# Altium PCB 3 wave VCO.PcbDoc
Units mm, origin at the board's own origin, x right, y up, seen from the top; angles counter-clockwise.
Board outline 39.3 x 106.5 mm, 2 copper layers (Top Layer, Bottom Layer); 67 components, 44 nets, 202 pads, 148 vias.
Unrouted connection lines stored in the file: 40.
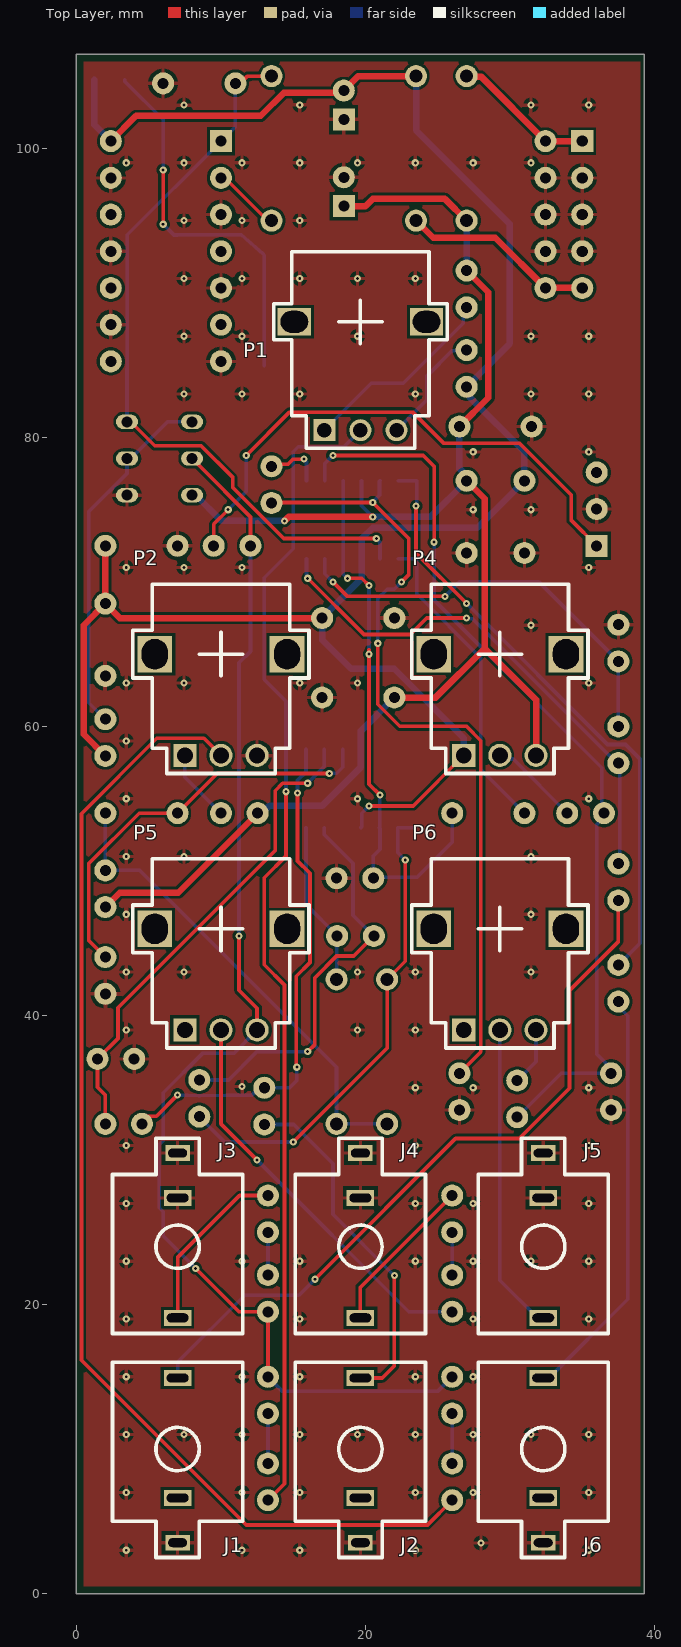
[diagram p0: Top Layer view]
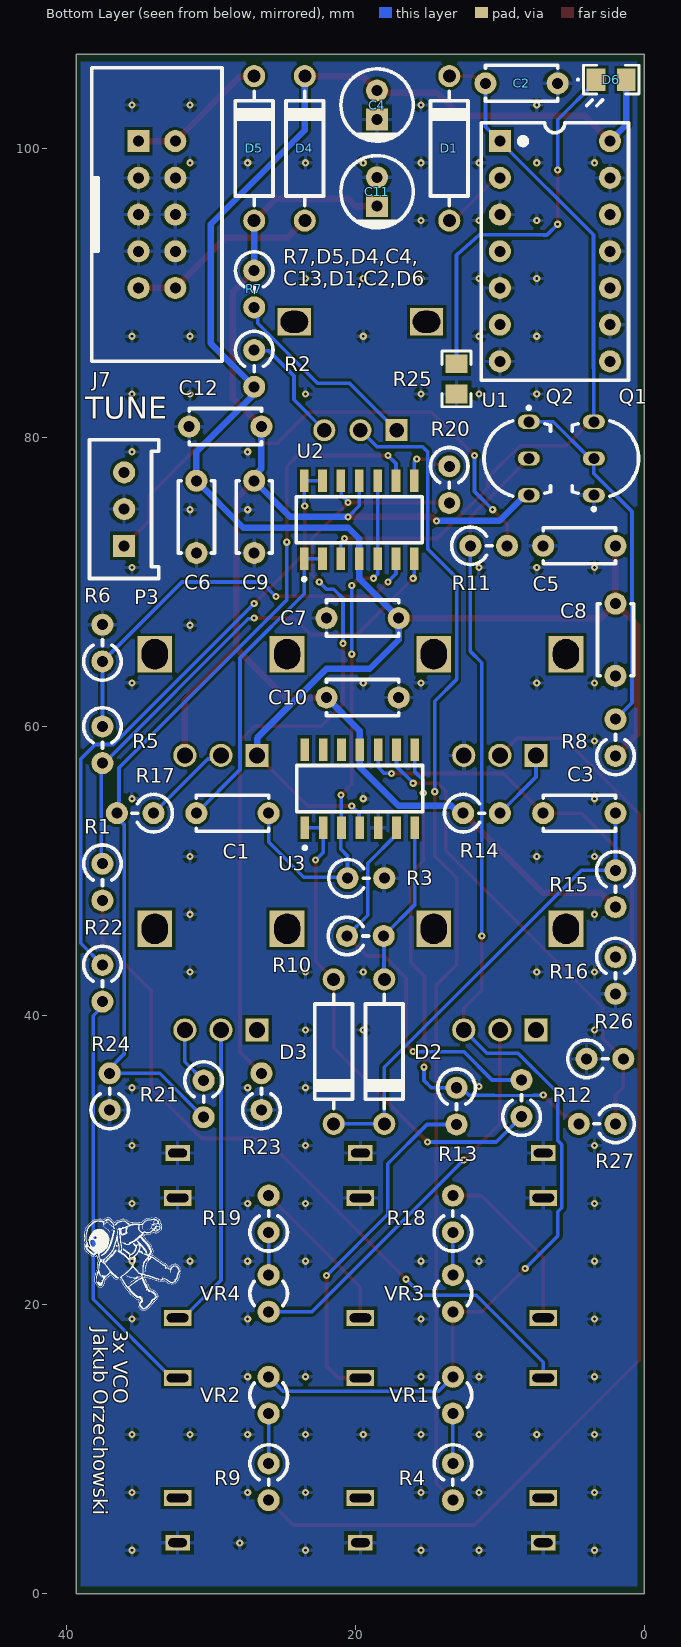
[diagram p1: Bottom Layer view, seen from below]
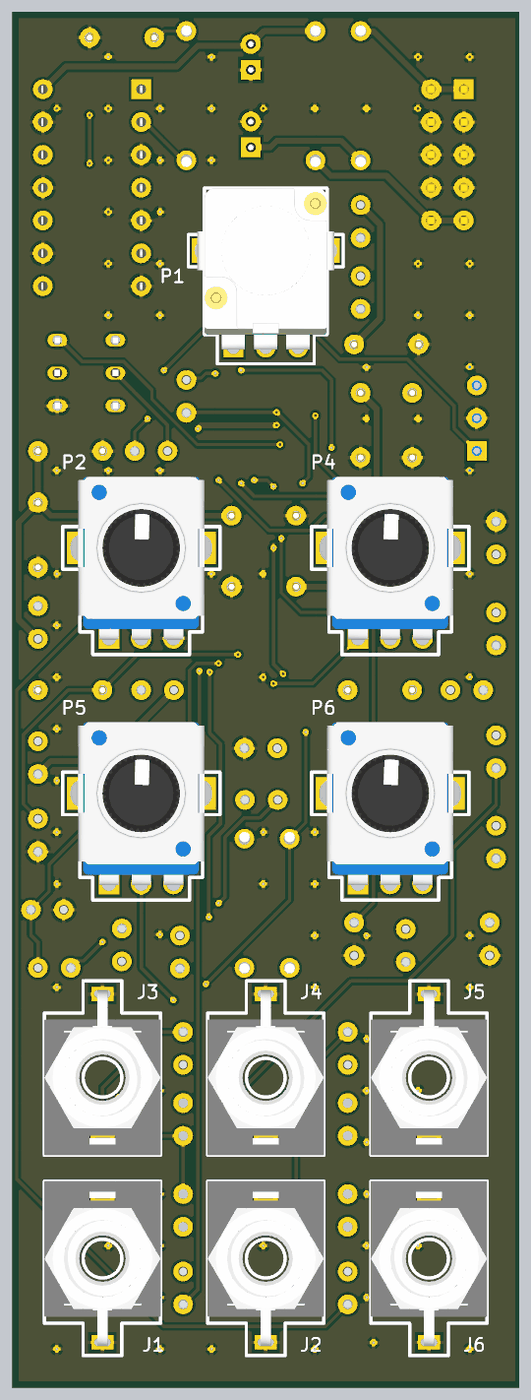
[diagram p2: 3D render of the assembled board from above, using the file's embedded part models]
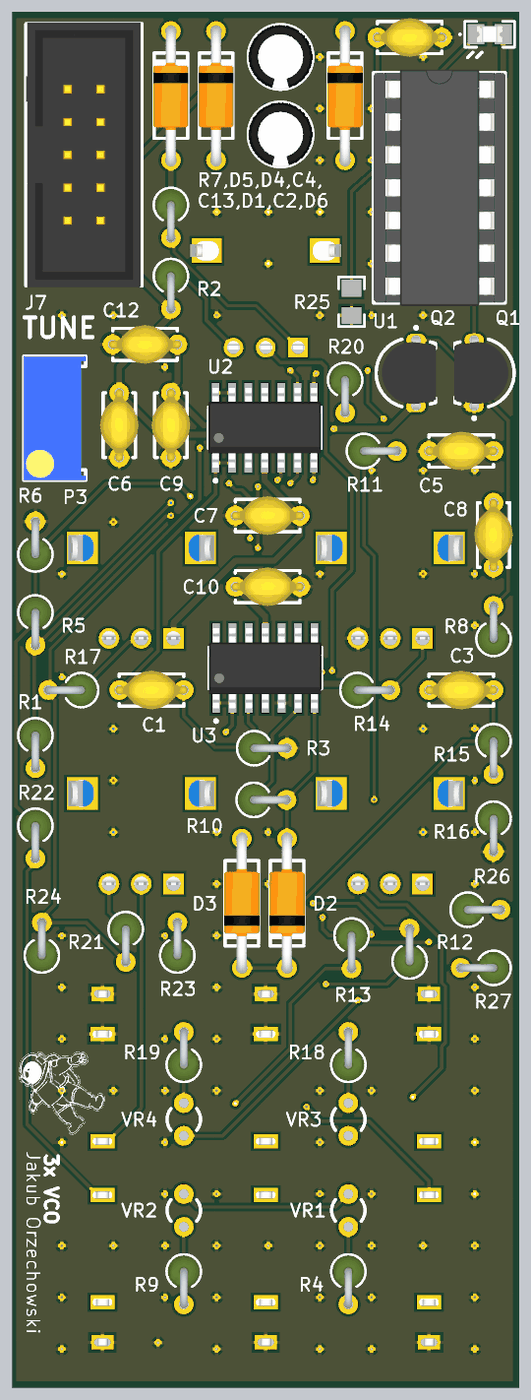
[diagram p3: 3D render of the assembled board from below, using the file's embedded part models]

## Layer stack, top to bottom
Top Solder: solder mask 0.0102, Solder Resist, Dk 3.5
Top Layer: signal copper 0.0356
Dielectric 1: dielectric 0.32, FR-4, Dk 4.8
Bottom Layer: signal copper 0.0356
Bottom Solder: solder mask 0.0102, Solder Resist, Dk 3.5

## Board outline
0,0 0,106.5 39.3,106.5 39.3,0

## Design rules (kind name [scope] priority, off if disabled: settings)
Clearance [All] p1: gap=0.2 ignorepadtopadclearanceinfootprint=FALSE except(0.25: Arc-Hole Track-Hole SMDPad-Hole THPad-Hole Via-Hole Fill-Hole Poly-Hole Region-Hole Text-Hole)
HoleSize [All] p1: absolutevalues=TRUE maxlimit=6.2 minlimit=0 maxpercent=80.000 minpercent=20.000
HoleToHoleClearance [All] p1: gap=0.3 allowstackedmicrovias=TRUE
MinimumSolderMaskSliver [All] p1: minsoldermaskwidth=0.2
PolygonConnect [All] p1: connectstyle=Relief reliefconductorwidth=0.254 reliefentries=4 polygonreliefangle="90 Angle" airgapwidth=0.254
RoutingVias [All] p1: holewidth=0.2 width=0.5 viastyle="Through Hole" minholewidth=0.15 minwidth=0.3 maxholewidth=0.711 maxwidth=1.27
SilkToSilkClearance [All] p1: silktosilkclearance=0.15
SilkToSolderMaskClearance [IsPad] p1: minsilkscreentomaskgap=0.1 clearancetoexposedcopper=TRUE
SolderMaskExpansion [All] p1: expansion=0.05 istentingtop=FALSE
SupplyNets "Schematic Supply Nets_2" [InNet('-12 V')] p1: voltage=0.000
SupplyNets "Schematic Supply Nets_1" [InNet('GND')] p2: voltage=0.000
SupplyNets "Schematic Supply Nets" [InNet('+12 V')] p3: voltage=0.000
Width [All] p1: maxlimit=0.5 minlimit=0.2 preferedwidth=0.254
25 further rules are at their usual default settings.

## Components (designator, comment, footprint, x,y, rotation, side; value= is the part's Value field where it differs from the comment)
C1 "CAP" "Cap THT 5mm" 26,54 r0 bottom value=1uF
C2 "CAP" "Cap THT 5mm" 6,104.5 r0 bottom value=2,2nF
C3 "CAP" "Cap THT 5mm" 7,54 r180 bottom value=1uF
C4 "CAP" "Cap electrolytic THT 5mm" 18.5,102 r90 bottom value=47uF
C5 "CAP" "Cap THT 5mm" 7,72.5 r180 bottom value=100nF
C6 "CAP" "Cap THT 5mm" 31,72 r90 bottom value=100nF
C7 "CAP" "Cap THT 5mm" 22,67.5 r180 bottom value=100nF
C8 "CAP" "Cap THT 5mm" 2,63.5 r90 bottom value=100nF
C9 "CAP" "Cap THT 5mm" 27,77 r270 bottom value=100nF
C10 "CAP" "Cap THT 5mm" 22,62 r180 bottom value=100nF
C11 "CAP" "Cap electrolytic THT 5mm" 18.5,96 r90 bottom value=47uF
C12 "CAP" "Cap THT 5mm" 26.5,80.75 r0 bottom value=100nF
D1 "DIODE" "Diode THT 10 mm" 13.5,95 r90 bottom
D2 "DIODE" "Diode THT 10 mm" 18,42.5 r270 bottom
D3 "DIODE" "Diode THT 10 mm" 21.5,42.5 r270 bottom
D4 "SCHOTTKY" "Diode THT 10 mm" 23.5,95 r90 bottom
D5 "SCHOTTKY" "Diode THT 10 mm" 27,95 r90 bottom
D6 "LED" "LED SMD 0805" 1.25,104.75 r0 bottom
J1 "JACK Mono" PJ301M 7,10 r0 top
J2 "JACK Mono" PJ301M 19.65,10 r0 top
J3 "JACK Mono" PJ301M 7,24 r180 top
J4 "JACK Mono" PJ301M 19.65,24 r180 top
J5 "JACK Mono" PJ301M 32.3,24 r180 top
J6 "JACK Mono" PJ301M 32.3,10 r0 top
J7 "IDC 10" "IDC 10 PIN" 35,100.5 r0 bottom
P1 "Mono Pot" "Alpha 9mm mono" 19.65,88 r0 top value=B100k
P2 "Mono Pot" "9 mm PCB Potentiometer" 10,65 r0 top value=B100k
P3 "VR" "Multiturn Potentiometer inline" 36,72.5 r90 bottom value=1k
P4 "Mono Pot" "9 mm PCB Potentiometer" 29.3,65 r0 top value=B100k
P5 "VR" "9 mm PCB Potentiometer" 10,46 r0 top value=B1Meg
P6 "VR" "9 mm PCB Potentiometer" 29.3,46 r0 top value=B250k
Q1 "BC548" "TO-92 wide" 3.5,81.08 r270 bottom
Q2 "BC558" "TO-92 wide" 8,76 r90 bottom
R1 "RES" "Resistor THT vertical" 37.5,50.5 r270 bottom value=1k
R2 "RES" "Resistor THT vertical" 27,86.04 r270 bottom value=100k
R3 "RES" "Resistor THT vertical" 20.54,49.5 r180 bottom value=100k
R4 "RES" "Resistor THT vertical" 13.25,9 r270 bottom value=100k
R5 "RES" "Resistor THT vertical" 37.5,60 r270 bottom value=100k
R6 "RES" "Resistor THT vertical" 37.5,64.5 r90 bottom value=47k
R7 "RES" "Resistor THT vertical" 27,91.54 r270 bottom value=33k
R8 "RES" "Resistor THT vertical" 2,57.96 r90 bottom value=1Meg
R9 "RES" "Resistor THT vertical" 26,9 r270 bottom value=1Meg
R10 "RES" "Resistor THT vertical" 20.58,45.5 r180 bottom value=10k
R11 "RES" "Resistor THT vertical" 12.04,72.5 r180 bottom value=1k5
R12 "RES" "Resistor THT vertical" 8.5,33 r90 bottom value=10k
R13 "RES" "Resistor THT vertical" 13,35 r270 bottom value=1k
R14 "RES" "Resistor THT vertical" 12.54,54 r180 bottom value=100k
R15 "RES" "Resistor THT vertical" 2,50.04 r270 bottom value=10k
R16 "RES" "Resistor THT vertical" 2,44.04 r270 bottom value=100k
R17 "RES" "Resistor THT vertical" 33.96,54 r0 bottom value=100k
R18 "RES" "Resistor THT vertical" 13.25,25 r90 bottom value=100k
R19 "RES" "Resistor THT vertical" 26,25 r90 bottom value=100k
R20 "RES" "Resistor THT vertical" 13.5,78 r270 bottom value=100k
R21 "RES" "Resistor THT vertical" 30.5,35.5 r270 bottom value=68k
R22 "RES" "Resistor THT vertical" 37.5,43.5 r270 bottom value=1k
R23 "RES" "Resistor THT vertical" 26.5,33.46 r90 bottom value=68k
R24 "RES" "Resistor THT vertical" 37,33.46 r90 bottom value=14k
R25 "RES" "Resistor SMD 0805" 13,85.1 r270 bottom value=10k
R26 "RES" "Resistor THT vertical" 4,37 r180 bottom value=47k
R27 "RES" "Resistor THT vertical" 2,32.5 r0 bottom value=100k
U1 "CD40106" "DIP-14 socket" 10,100.5 r180 bottom
U2 "TL074CDR" SOIC14 23.54,71.6 r90 bottom
U3 "TL074CDR" SOIC14 23.5,53 r90 bottom
VR1 "NTC" "THERMISTOR THT 2,54 MM" 13.25,12.46 r90 bottom value=10k
VR2 "NTC" "THERMISTOR THT 2,54 MM" 26,12.46 r90 bottom value=10k
VR3 "NTC" "THERMISTOR THT 2,54 MM" 13.25,22.04 r270 bottom value=10k
VR4 "NTC" "THERMISTOR THT 2,54 MM" 26,22.04 r270 bottom value=10k

## Footprints (in the part's own frame and the unit in brackets; to place one, negate y for a bottom-side part, rotate by r counter-clockwise, add the part's x,y. Pads: shape width x height; smd on the part's side, far side on the other; paste and mask are expansions set on the pad)
"9 mm PCB Potentiometer" [mm] "Generic 9 mm shaft potentiometer PCB mount"
  rect 1.6x1.6 hole 1.1: 1(-2.5,-7)
  round 1.6 hole 1.1: 2(0,-7) 3(2.5,-7)
  rect 2.4x2.5 hole 1.8 slot 2.1 at 90 deg: 11(-4.575,0) 11(4.575,0)
  silkscreen extent -6.1,-8.25 6.1,4.85, body extent -5.66,-7.1 5.66,5.5, height 25
"Alpha 9mm mono" [mm] "Alpha 9 mm mono potentiometer"
  rect 1.524x1.524 hole 1: 1(-2.5,-7.5)
  round 1.524 hole 1: 2(0,-7.5) 3(2.5,-7.5)
  rect 2.3x1.9 hole 1.5 slot 1.9 at 0 deg: 11(-4.575,0) 11(4.575,0)
  silkscreen extent -6,-8.75 6,4.85, body extent -5.85,-7.65 5.85,4.85, height 25.1
"Cap electrolytic THT 5mm" [mil] "THT electrolytic capacitor 5 mm diameter"
  rect 60x60 hole 30: 1(0,0)
  round 60 hole 30: 2(78.74,0)
  silkscreen extent -59,-98 138,98, body extent -59,-98 137,98, height 354
"Cap THT 5mm" [mil] "THT ceramic capacitor 5 mm pitch"
  round 60 hole 30: 1(0,0) 2(196.85,0)
  silkscreen extent 0,-49 197,49, body extent -11,-59 208,59, height 197
"Diode THT 10 mm" [mil] "THT axial diode 10 mm pitch"
  round 60 hole 35.43: 1(0,0) 2(393.7,0)
  silkscreen extent 41,-51 352,51, body extent -21,-53 411,53, height 107
"DIP-14 socket" [mil] "Socket for DIP-14 ICs"
  rect 60x60 hole 30: 1(0,0)
  round 60 hole 30: 2(0,-100) 3(0,-200) 4(0,-300) 5(0,-400) 6(0,-500) 7(0,-600) 8(300,-600) 9(300,-500) 10(300,-400) 11(300,-300) 12(300,-200) 13(300,-100) 14(300,0)
  silkscreen extent -51,-651 350,50, body extent -50,-660 352,60, height 310
"IDC 10 PIN" [mil] "10 PIN IDC Connector"
  rect 60x60 hole 30: 1(0,0)
  round 60 hole 30: 2(-100,0) 3(0,100) 4(-100,100) 5(0,200) 6(-100,200) 7(0,300) 8(-100,300) 9(0,400) 10(-100,400)
  silkscreen extent -227,-200 127,600, body extent -223,-204 127,604, height 354
"LED SMD 0805" [mm] "SMD LED diode 0805 package"
  rect 1.3x1.55 smd: 1(0,0) 2(2.1,0)
  silkscreen extent -0.87,-1 3.36,1.8, body extent 0.05,-0.63 2.05,0.63, height 0.8
"Multiturn Potentiometer inline" [mil] "PCB mount inline multiturn trimmer pot with parameter label"
  rect 60x60 hole 30: 1(0,0)
  round 60 hole 30: 2(100,0) 3(200,0)
  silkscreen extent -89,-94 289,94, body extent -89,-95 289,95, height 454
PJ301M [mm] "3,5 mm Jack mono PCB Mount"
  rect 1.7x1.1 hole 0.6 slot 1.3 at 0 deg: 1(0,-6.48)
  rect 1.9x1.1 hole 0.6 slot 1.5 at 0 deg: 2(0,-3.38) 3(0,4.92)
  silkscreen extent -4.5,-7.5 4.5,6, body extent -4.5,-6.73 4.5,6, height 14
"Resistor SMD 0805" [mm] "SMD resistor 0805 package"
  rect 1.3x1.55 smd: 1(0,0) 2(2.1,0)
  silkscreen extent -0.87,-1 2.98,1, body extent -0.1,-0.72 2.2,0.72, height 0.7
"Resistor THT vertical" [mil] "THT axial resistor 10 mm pitch"
  round 60 hole 30: 1(0,0) 2(100,0)
  silkscreen extent -51,-51 59,51, body extent -49,-49 112,49, height 406
SOIC14 [mm] "SOIC14 SMD package"
  rect 1.55x0.6 smd: 1(0,0) 2(0,-1.27) 3(0,-2.54) 4(0,-3.81) 5(0,-5.08) 6(0,-6.35) 7(0,-7.62) 8(5.4,-7.62) 9(5.4,-6.35) 10(5.4,-5.08) 11(5.4,-3.81) 12(5.4,-2.54) 13(5.4,-1.27) 14(5.4,0)
  silkscreen extent -1.5,-8.17 4.3,0.55, body extent -0.4,-8.19 5.8,0.57, height 1.75
"THERMISTOR THT 2,54 MM" [mil]
  round 60 hole 30: 1(0,0) 2(100,0)
  silkscreen extent 17,-51 83,51
"TO-92 wide" [mil] "TO-92 THT package wide legs"
  oval 39.37x60 hole 30: 1(0,0) 2(100,0) 3(200,0)
  silkscreen extent -3,-59 242,122, body extent -9,-61 209,104, height 323

## Part data
C1 C2 C3 C5 C6 C7 C8 C9 C10 C12: library part "Capacitor THT 5mm", "THT Capacitor Non-Polarised 5 mm Pitch", Package Type=THT
C4 C11: library part "Capacitor Electr THT 5mm", "THT Electrolytic Capacitor 5 mm Diameter", Package Type=THT
D1 D2 D3: library part "Diode THT", "Generic THT Axial Diode 10 mm Pitch", Package Type=THT, Model=1N4148, Type=Diode
D4 D5: library part "Schottky Diode THT", "Generic THT Axial Schottky Diode 10 mm Pitch", Package Type=THT, Model=1N5819, Type=Schottky
D6: library part "LED SMD", "SMD LED Diode 0805 Package", Color=GREEN, Package Type=SMD, Type=LED
J1 J2 J3 J4 J5 J6: library part PJ301M, "PJ301M Eurorack 3,5 mm Patch Socket PCB Mount", Package Type=THT
  J1: Label="SAW OUT"
  J2: Label="TRIANGLE OUT"
  J3: Label="CV 1V/OCT"
  J4: Label="FM CV"
  J5: Label="PWM CV"
  J6: Label="PULSE OUT"
J7: library part "IDC 10 pin", "10 Pin IDC Connector"
P1: library part "Potentiometer Alpha 9mm mono", "PCB Mount Alpha 9mm Mono Potentiometer THT", Package Type=THT, Parameter="F COARSE", Type=Potentiometer
P2 P4: library part "Potentiometer 9 mm", "PCB Mount 9mm Mono Potentiometer THT", Package Type=THT, Type=Potentiometer
  P2: Parameter="F FINE"
  P4: Parameter="PWM WIDTH"
P3: library part "VR A Multiturn THT", "PCB Mount Multiturn Trimmer Potentiometer Top Adjustable as Variable Resistor Clockwise Increase", Package Type=THT, Parameter=TUNE, Type=Potentiometer
P5 P6: library part "VR B 9 mm", "PCB Mount 9mm Mono Potentiometer THT as Variable Resistor Clockwise Decrease", Package Type=THT, Type=Potentiometer
  P5: Parameter="FM CV LVL"
  P6: Parameter="PWM CV LVL"
Q1: "BC548 NPN Transistor THT TO-92 Package", Package=TO-92, Package Type=THT, Type="NPN Transistor"
Q2: "BC558 PNP Transistor THT TO-92 Package", Package=TO-92, Package Type=THT, Type="PNP Transistor"
R1 R2 R3 R4 R5 R6 R7 R8 R9 R10 R11 R12 R13 R14 R15 R16 R17 R18 R19 R20 R21 R22 R23 R24 R26 R27: library part "Resistor THT", "THT Axial Resistor 10mm Pitch", Package Type=THT
R25: library part "Resistor SMD 0805", "SMD Resistor 0805 package", Package Type=SMD
U1: library part "CD40106 DIP-14", "CD40106 Hex Schmitt Trigger Inverter DIP-14 Package", Package=DIP-14, Package Type=THT, Type="Schmitt Trigger"
U2 U3: library part "TL074CDR SOIC14", "TL074CDR Quad Op-Amp SOIC14 Package", Package=SOIC14, Package Type=SMD, Type="Op Amp"
VR1 VR2 VR3 VR4: library part "Thermistor NTC THT", "THT NTC Thermistor 2,54 mm Pitch", Package Type=THT

## Via types
v1: diameter 0.5, hole 0.2, Top Layer to Bottom Layer, 148 vias

## Nets (pads, with @x,y where several pads share a name; then routed paths per layer and width w, separated by ;. In a path a pad name is that pad's centre, name@x,y a point inside that pad or via, vN(x,y) a via of type N, cw(c..) or ccw(c..) an arc to the next point about the centre after c; other vN are vias at no path point)
1V/OCT: J3.3 R18.2 | length 12.2
  Top Layer w0.254: J3.3 7,23.25 11.29,27.54 R18.2
"+12 V": C4.2 C5.2 C6.2 C7.2 C8.2 D4.2 D6.1 P4.1 R2.2 R8.1 U1.14 U2.4 U3.4 | length 137.1
  Top Layer w0.254: v1(20.25,54.5) 23.3,54.5 P4.1
  Top Layer w0.45: R8.1 0.5,59.46 0.5,67 C8.2 ; C5.2 C8.2 ; U1.14 4.13,102.25 12.75,102.25 14.357,103.857 18.357,103.857 C4.2 19.5,105 D4.2 ; C7.2 3,67.5 C8.2
  Bottom Layer w0.254: U3.4 19.75,53.06 19.75,54 v1(20.25,54.5)
  Bottom Layer w0.45: D6.1 1.25,101.63 U1.14 ; D4.2 23.5,101.25 30,94.75 30,86.5 R2.2 27.205,83.295 27.205,82.795 31,79 C6.2 27.75,73.75 20.5,73.75 19.73,72.98 U2.4 19.73,70.23 C7.2 17,66 19,64 22,64 26.8,59.2 P4.1
"-12 V": C9.1 C10.1 C11.1 C12.1 D5.1 P4.3 Q2.1 R7.1 R14.1 R15.2 U2.11 U3.11 | length 108.8
  Top Layer w0.45: R15.2 3,48.5 7.04,48.5 R14.1 ; v1(14.394,74.219) 14.675,74.5 v1(20.5,74.5) ; C11.1 20,96 20.5,96.5 25.5,96.5 D5.1 ; C10.1 24.852,62 28.25,65.398 ; C12.1 28.5,82.75 28.5,83 28.5,90.04 R7.1 ; C9.1 28.25,75.75 28.25,65.398 ; P4.3 31.8,61.848 28.25,65.398
  Bottom Layer w0.254: U2.11 19.73,75.27 v1(20.5,74.5)
  Bottom Layer w0.45: Q2.1 8.262,76 10.043,74.219 v1(14.394,74.219) ; R14.1 12.831,54 13.331,54.5 17,54.5 19.69,57.19 U3.11 19.69,59.69 C10.1 ; v1(20.5,74.5) 24.5,74.5 C9.1 27,77.344 26.5,77.844 C12.1 ; R7.1 D5.1
"FM CV": J4.3 R19.2 | length 11.1
  Top Layer w0.254: J4.3 19.65,21.19 R19.2
GND: C2.1 C4.1 C5.1 C6.1 C7.1 C8.1 C9.2 C10.2 C11.2 C12.2 J1.1 J2.1 J3.1 J3.2 J4.1 J4.2 J5.1 J5.2 J6.1 J7.3 J7.4 J7.5 J7.6 J7.7 J7.8 P2.3 P3.2 Q1.3 R3.2 R6.2 R16.2 R23.1 R24.1 R25.2 R26.1 U1.3 U1.5 U1.7 U1.9 U1.11 U1.13 U3.5
  other v1: 3.45,3 11.45,3 15.45,3 23.45,3 35.45,3 28,3.5 3.45,7 11.45,7 15.45,7 23.45,7 27.45,7 35.45,7 3.45,11 7.45,11 11.45,11 15.45,11 19.45,11 23.45,11 27.45,11 31.45,11 35.45,11 3.45,15 11.45,15 15.45,15 23.45,15 27.45,15 3.45,19 15.45,19 27.45,19 35.45,19 3.45,23 11.45,23 15.45,23 23.45,23 27.45,23 31.45,23 35.45,23 3.45,27 23.45,27 27.45,27 35.45,27 3.45,31 23.45,31 35.45,31 23.45,35 27.45,35 35.45,35 11.45,35.077 3.45,39 19.45,39 23.45,39 3.45,43 7.45,43 19.45,43 23.45,43 31.45,43 3.45,47 31.45,47 3.45,51 7.45,51 31.45,51 3.45,55 19.45,55 35.45,55 3.45,59 3.45,63 7.45,63 15.45,63 19.45,63 35.45,63 31.45,67 3.45,71 7.45,71 11.45,71 35.45,71 27.45,75 31.45,75 27.45,79 35.45,79 7.45,83 11.45,83 15.45,83 23.45,83 31.45,83 35.45,83 7.45,87 11.45,87 19.45,87 31.45,87 35.45,87 7.45,91 11.45,91 15.45,91 19.45,91 23.45,91 7.45,95 11.45,95 15.45,95 3.45,99 7.45,99 11.45,99 15.45,99 19.45,99 23.45,99 27.45,99 31.45,99 7.45,103 15.45,103 31.45,103 35.45,103
NetC1_1: C1.1 R3.1 U2.5 U2.10 U3.3 | length 37.9
  Top Layer w0.254: v1(18.75,70.25) 19.75,70.25 v1(20.25,69.75) ; 20.25,65.3 20.25,56 v1(21,55.25)
  Bottom Layer w0.254: U2.10 U2.5 18.46,70.54 v1(18.75,70.25) ; 20.25,65.3 v1(20.25,69.75) ; v1(21,55.25) 20.982,55.232 20.982,53.022 U3.3 21,52.96 21,51.5 20.54,51.04 R3.1 20.609,49.569 23.569,49.569 26,52 C1.1
  other v1: 20.25,65
NetC1_2: C1.2 U2.1 U2.2 | length 22
  Bottom Layer w0.254: U2.2 U2.1 23.54,69.174 27.981,64.733 27.981,57.019 C1.2
NetC2_2: C2.2 D1.2 Q1.1 U1.1 U2.3 | length 51.7
  Top Layer w0.254: Q1.1 3.762,81.08 5.421,79.421 8.627,79.421 10.827,77.221 10.827,76.517 14.344,73 v1(20.75,73) ; C2.2 11.344,104.5 11.844,105 D1.2
  Bottom Layer w0.254: Q1.1 3.5,84.764 3.523,84.787 3.523,94.023 U1.1 11,101.5 C2.2 ; v1(20.75,73) 21,72.75 U2.3
NetC3_1: C3.1 R16.1 U3.10 | length 28.5
  Top Layer w0.254: R16.1 0.857,45.183 0.857,50.513 4.344,54 C3.1 9.75,56.75 v1(17.5,56.75)
  Bottom Layer w0.254: v1(17.5,56.75) 17.518,56.768 18.018,56.768 18.42,57.17 U3.10
NetC3_2: C3.2 D2.2 D3.2 R15.1 | length 33
  Bottom Layer w0.254: C3.2 R15.1 4.374,50.04 18,36.414 D2.2 D3.2
NetD1_1: D1.1 U1.2 | length 4.7
  Top Layer w0.254: U1.2 10.27,97.96 13.23,95 D1.1
NetD2_1: D2.1 R10.2 U3.7 | length 11.4
  Bottom Layer w0.254: U3.7 15.88,47.684 18.04,45.524 R10.2 18.02,45.48 18.02,42.52 D2.1
NetD3_1: D3.1 R12.1 U3.1 U3.2 | length 33.7
  Top Layer w0.254: v1(15,31.25) 21.5,37.75 D3.1 22.75,43.75 v1(22.75,50.75)
  Bottom Layer w0.254: R12.1 10.25,31.25 v1(15,31.25) ; v1(22.75,50.75) 22.23,51.27 U3.2 U3.1
NetD4_1: D4.1 J7.9 J7.10 | length 13.4
  Top Layer w0.45: D4.1 24.687,93.813 28.987,93.813 J7.10 J7.9
NetD5_2: D5.2 J7.1 J7.2 | length 9.9
  Top Layer w0.45: D5.2 27.034,104.966 27.994,104.966 J7.2 J7.1
NetD6_2: D6.2 R25.1 | length 26.6
  Top Layer w0.254: v1(6,94.75) v1(6,98.5)
  Bottom Layer w0.254: D6.2 3.35,104.625 6,101.975 v1(6,98.5) ; v1(6,94.75) 6.676,94.074 6.75,94 6.96,94 10.896,94.03 cw(c10.898,93.776) 10.901,94.03 11.314,94.022 11.407,94.02 12.914,92.698 12.92,92.693 12.926,92.687 ; 12.926,92.687 13,92.613 R25.1@13,84.971
NetP1_1: P1.1 R7.2 | length 13.9
  Bottom Layer w0.254: P1.1 20.4,83.75 22.614,83.75 26.757,87.893 26.757,88.757 R7.2
NetP1_2: P1.2 R4.2 | length 80.9
  Top Layer w0.254: R4.2 14.393,7.603 14.393,42.107 12.994,43.506 12.994,49.528 14.5,51.034 14.5,55.484 v1(14.503,55.487)
  Bottom Layer w0.254: v1(14.503,55.487) 14.5,55.49 14.5,61.75 12.994,63.256 12.994,70.288 15,72.294 15,79 15.357,79.357 18.507,79.357 P1.2
NetP1_3: P1.3 R2.1 | length 8.1
  Bottom Layer w0.254: P1.3 24.25,82.6 24.25,84.25 26.006,86.006 26.966,86.006 R2.1
NetP2_1: P2.1 R14.2 | length 5
  Bottom Layer w0.254: P2.1 7.5,56.5 R14.2
NetP2_2: P2.2 R9.2 | length 81.2
  Top Layer w0.254: P2.2 8.819,59.181 5.565,59.181 0.349,53.965 0.349,16.151 11.75,4.75 24.29,4.75 R9.2
NetP3_1: P3.1 R11.2 | length 37.5
  Top Layer w0.254: R11.2 9.5,74 v1(10.5,75) ; v1(11.75,78.75) 14.75,81.75 23.25,81.75 25.393,79.607 30.643,79.607 34.25,76 34.25,74.25 P3.1
  Bottom Layer w0.254: v1(10.5,75) 11.75,76.25 v1(11.75,78.75)
NetP4_2: P4.2 R17.1 | length 6.3
  Bottom Layer w0.254: P4.2 29.558,57.742 30.218,57.742 R17.1
NetP5_2: P5.2 VR4.2 | length 27.9
  Top Layer w0.254: P5.2 10,32.5 v1(12.5,30)
  Bottom Layer w0.254: v1(12.5,30) 23,19.5 VR4.2
NetP5_3: P5.3 Q2.2 R11.1 VR1.2 VR2.2 VR3.2 | length 88
  Top Layer w0.254: Q2.2 8.06,78.54 8.405,78.195 8.405,78.135 12.04,74.5 R11.1 ; v1(8.25,22.5) 11.25,19.5 VR3.2 VR1.2 ; v1(11.25,45.5) 11.25,41.75 12.5,40.5 P5.3
  Bottom Layer w0.254: v1(8.25,22.5) 6,24.75 6,26.418 5.723,26.695 5.723,31.065 6,31.342 6,34.656 8.722,37.378 10.878,37.378 P5.3 ; v1(11.25,45.5) 11.25,64.404 12.04,65.194 R11.1 ; VR1.2 14.261,13.989 24.989,13.989 VR2.2
NetP6_3: P6.3 R21.1 | length 4
  Bottom Layer w0.254: R21.1 31.8,36.8 P6.3
NetQ1_2: Q1.2 Q2.3 R8.2 | length 25.2
  Bottom Layer w0.254: R8.2 0.857,61.643 0.857,74.865 3.5,77.508 Q1.2 3.762,78.54 6.302,81.08 Q2.3
NetR1_1: R1.1 R5.2 U2.7 | length 36.2
  Top Layer w0.254: v1(16,70.25) 19.893,66.357 23.093,66.357 24.236,67.5 v1(27,67.5)
  Bottom Layer w0.254: U2.7 15.92,70.356 16,70.276 v1(16,70.25) ; v1(27,67.5) 27.047,67.453 27.405,67.453 37.398,57.46 R5.2 37.589,57.371 37.589,50.589 R1.1
NetR4_1: R4.1 VR1.1 | length 3.5
  Bottom Layer w0.254: R4.1 VR1.1
NetR5_1: R5.1 R6.1 U2.6 | length 29.2
  Top Layer w0.254: v1(17.75,70) 18.75,69 v1(25.5,69)
  Bottom Layer w0.254: U2.6 17.19,70.56 v1(17.75,70) ; v1(25.5,69) 26.5,70 32,70 R6.1 R5.1
NetR9_1: R9.1 VR2.1 | length 3.5
  Bottom Layer w0.254: R9.1 VR2.1
NetR10_1: R10.1 R12.2 U3.6 | length 27.8
  Top Layer w0.254: v1(16,37.5) 16.5,38 16.5,42.616 17.999,44.115 19.195,44.115 R10.1
  Bottom Layer w0.254: R12.2 10.54,35.54 12.5,37.5 v1(16,37.5) ; U3.6 17.15,52.525 19.143,50.532 19.143,46.937 R10.1
NetR13_1: R13.1 R27.2 U3.8 | length 35.6
  Top Layer w0.254: R27.2@4.54,33 4.574,33.034 5.534,33.034 v1(7,34.5) ; v1(15.25,36.423) 15.219,36.454 15.219,42.722 16.156,43.659 16.156,49.837 15.3,50.693 v1(15.3,55.4)
  Bottom Layer w0.254: v1(7,34.5) 8.464,34.452 ccw(c8.5,35.54) 8.515,34.451 12.156,34.5 12.656,35 R13.1 14.75,35 15.25,35.5 v1(15.25,36.423) ; v1(15.3,55.4) 15.3,56.269 15.88,56.849 U3.8
NetR17_2: R17.2 R21.2 R24.2 U2.9 | length 64.5
  Top Layer w0.254: v1(17.75,78.75) 24,78.75 24.75,78 v1(24.75,72.75)
  Bottom Layer w0.254: U2.9 17.19,78.19 v1(17.75,78.75) ; v1(24.75,72.75) 24.75,68.75 36.357,57.143 36.357,54.143 R17.2 36.5,53.716 36,53.216 36,37.33 37,36.33 R24.2 33.54,36 R21.2
NetR18_1: R18.1 VR3.1 | length 3
  Bottom Layer w0.254: VR3.1 R18.1
NetR19_1: R19.1 VR4.1 | length 3
  Bottom Layer w0.254: VR4.1 R19.1
NetR20_1: R20.1 U2.8 | length 4
  Top Layer w0.254: R20.1 13.643,78.143 14.643,78.143 15,78.5 v1(15.75,78.5)
  Bottom Layer w0.254: v1(15.75,78.5) 15.75,78.488 15.92,78.318 U2.8
NetR20_2: R20.2 R23.2 U2.12 | length 56.7
  Top Layer w0.254: R20.2 13.54,75.5 v1(20.5,75.5) 22.984,73.016 22.984,70.484 v1(22.5,70) ; v1(20.854,65.75) 20.854,61.53 22.376,60.008 26.992,60.008 27.981,59.019 27.981,37.481 R23.2
  Bottom Layer w0.254: v1(20.5,75.5) 20.5,75.526 20.967,75.993 20.967,76.967 U2.12 ; v1(20.854,65.75) 20.854,68.854 21.5,69.5 22,69.5 v1(22.5,70)
NetR22_1: R22.1 U2.13 U2.14 | length 42.6
  Top Layer w0.254: v1(23.5,75.25) 23.5,72 v1(27,68.5)
  Bottom Layer w0.254: U2.13 U2.14 23.54,75.29 v1(23.5,75.25) ; v1(27,68.5) 36.75,58.75 38,58.75 39,57.75 39,45 R22.1
NetR26_2: R26.2 R27.1 U3.9 | length 33.6
  Top Layer w0.254: R27.1 2,34.5 1.46,35.04 R26.2 2.873,38.413 2.873,40.536 13.75,51.413 13.75,55.55 14.267,56.067 v1(16,56.067)
  Bottom Layer w0.254: v1(16,56.067) 16.123,56.19 16.123,56.207 17.15,57.234 U3.9
"PULSE out": J6.3 R22.2 | length 29
  Bottom Layer w0.254: J6.3 32.7,14.92 38.143,20.363 38.143,39.987 37.5,40.63 R22.2
"PWM CV": J5.3 P6.2 | length 21.4
  Bottom Layer w0.254: P6.2 29.3,21.68 31.9,19.08 J5.3
"SAW out": J1.3 R1.2 | length 50.5
  Top Layer w0.254: v1(16.5,21.75) 26.236,31.486 30.643,31.486 34.115,34.959 34.115,41.732 37.5,45.116 R1.2
  Bottom Layer w0.254: J1.3 7,16 11.643,20.643 15.393,20.643 v1(16.5,21.75)
"TRI out": J2.3 R13.2 | length 24.3
  Top Layer w0.254: J2.3 21.17,14.92 22,15.75 v1(22,22)
  Bottom Layer w0.254: R13.2 15.04,32.46 17.75,29.75 17.75,26.25 v1(22,22)
pads on no net: J1.2 J2.2 J6.2 P1.11 P2.11 P3.3 P4.11 P5.1 P5.11 P6.1 P6.11 U1.4 U1.6 U1.8 U1.10 U1.12 U3.12 U3.13 U3.14

## Polygon pours and split planes (outlines as drawn)
GND on Bottom Layer "NONET_L01_P-001" (solid, pour order 0): 39,106 0.5,106 0.5,0.5 39,0.5
GND on Top Layer "NONET_L01_P-001" (solid, pour order 1): 39,106 0.5,106 0.5,0.5 39,0.5

## Silkscreen, mask and mechanical layers (free items; w line width, h text height)
Bottom Overlay:
  drawing of 11 lines, arcs and shapes, not listed
  text "R7,D5,D4,C4, / C13,D1,C2,D6" at 25,90.5 h1
  text "TUNE" at 38.7,81.3 h1.52
  text "Jakub Orzechowski" at 38.15,18.4 h1 r90
  text "3x VCO" at 36.75,18.25 h1 r90
Mechanical 1:
  the board outline again, w0.254